# EAGLE board UI_holes (EAGLE 9.2.2)
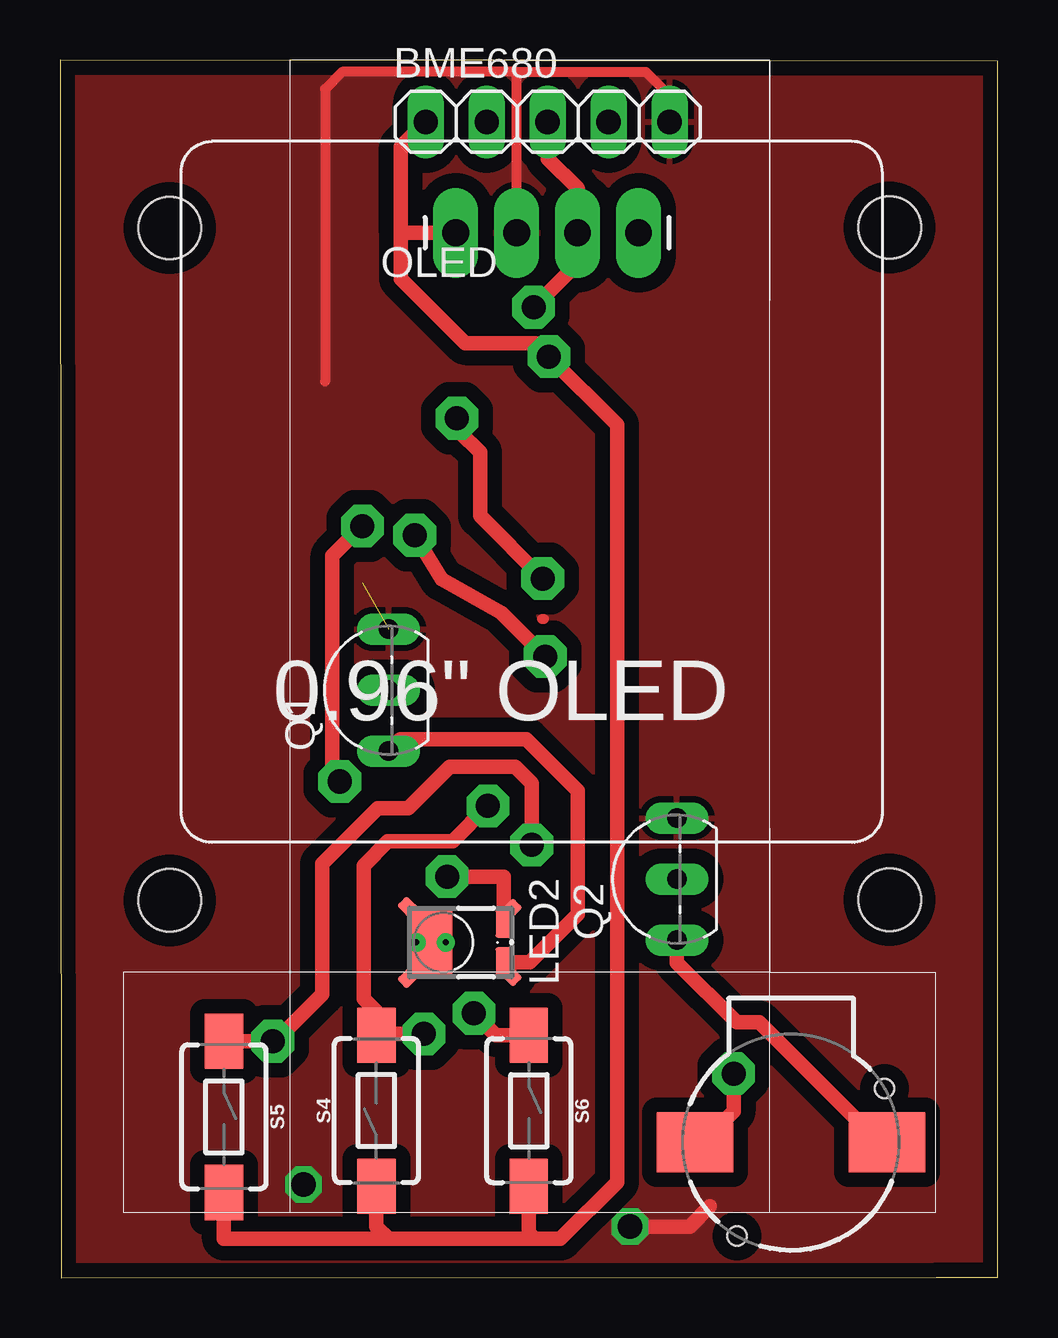
[diagram p0: board, top side]
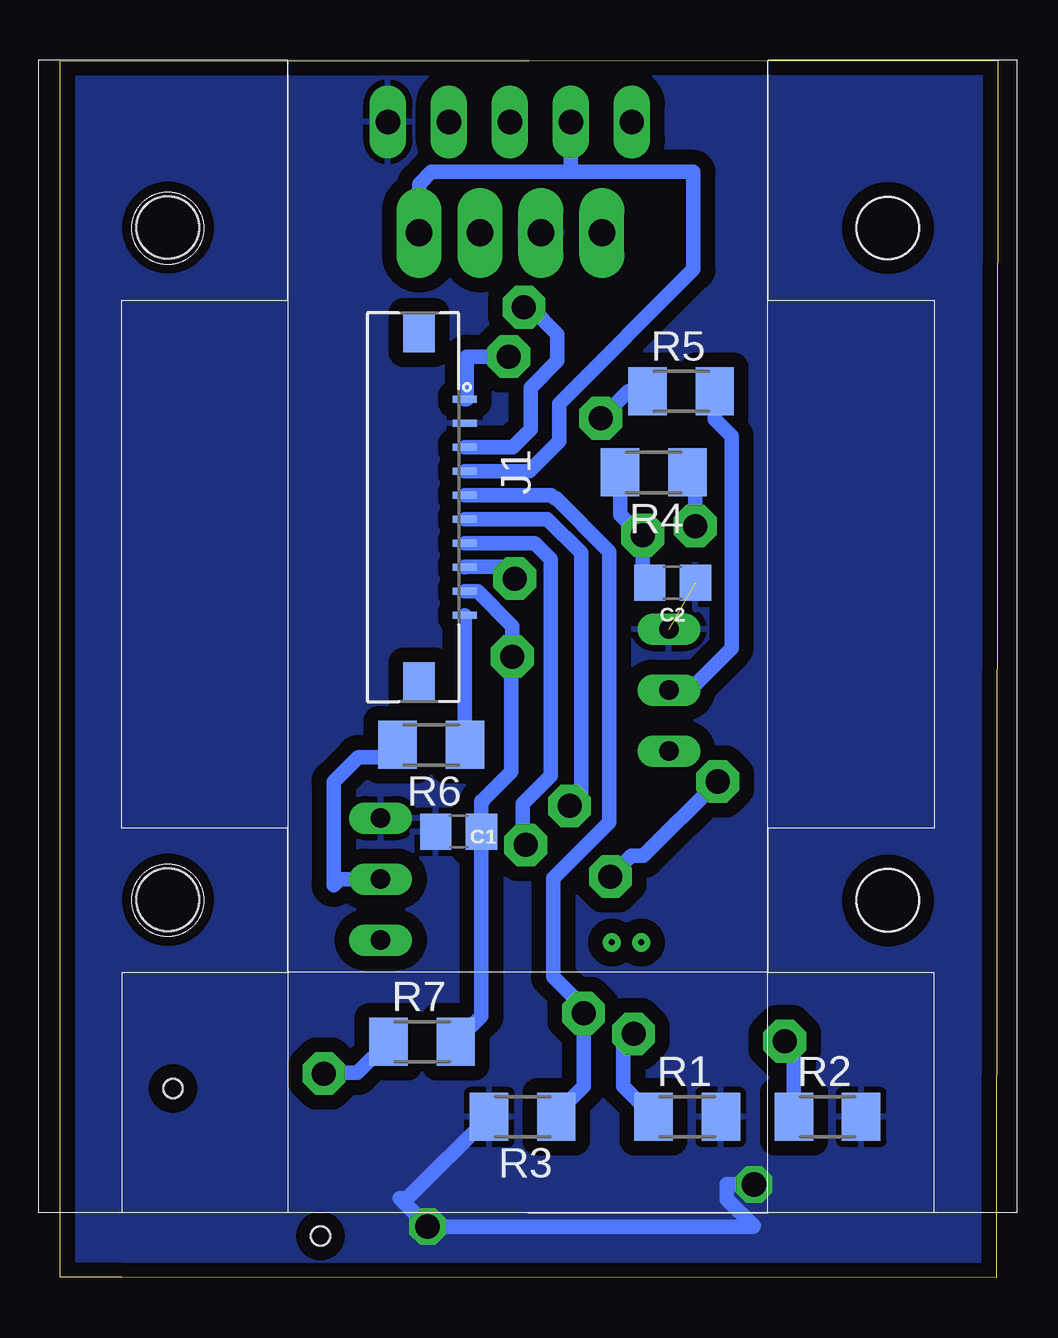
[diagram p1: board, bottom side, seen from below]

Size 39.07 x 50.74 mm. Coordinates in mm from the lower left corner, seen from the top.
Outline: 0.05,0 36.5,0.03 36.55,0.03 39.07,0.03 39.07,50.69 0,50.74 0.05,0
Copper layers (1*16): Top 0.035mm / dielectric 1.5mm / Bottom 0.035mm
Design rules "default *": minimum track width 6mil, minimum drill 0.35mm, track to track 6mil, track to pad 6mil, pad to pad 6mil, via to via 6mil, smd to smd 6mil, copper to edge 10mil, drill to drill 6mil, minimum pad ring 10mil, minimum via ring 8mil, stop-mask expansion 4mil, vias tented up to drill 0mil, thermal gap 10mil
Net classes: 0 default: width 0.254 mm, drill 0.508 mm, clearance 0.254 mm
Holes 2.6 mm at 4.57,43.74 34.57,43.76 4.57,15.72 34.57,15.75

## Footprints (pad centres in the part's own frame; a part is rotated, then mirrored left to right if it is on the bottom)
BUZZER-CCV = smd 3.2 x 2.5: + 4,0; - -4,0 | hole 0.8: -3.9,-2.25; 2.25,3.9
1X05 = drill 1.016 long: 1 -5.08,0; 2 -2.54,0; 3 0,0; 4 2.54,0; 5 5.08,0
C0805 = smd 1.3 x 1.5: 1 -0.95,0; 2 0.95,0
686110183422 = smd 0.3 x 1: 1 -4.5,1.9; 2 -3.5,1.9; 3 -2.5,1.9; 4 -1.5,1.9; 5 -0.5,1.9; 6 0.5,1.9; 7 1.5,1.9; 8 2.5,1.9; 9 3.5,1.9; 10 4.5,1.9 | smd 1.65 x 1.3: Z1 -7.275,0; Z2 7.275,0
LUXEON_REBEL = smd 1.2 x 0.67: A 0.8,-2.51; C -0.8,-2.51 | smd 1 x 0.6 rotated 315: A@1 1.31,-2.75 | smd 1 x 0.6 rotated 225: C@1 -1.31,-2.75 | smd 2.8 x 1.77: TH 0,0.51 | smd 1 x 0.6 rotated 135: TH@1 -1.39,1.39 | smd 1 x 0.6 rotated 45: TH@2 1.39,1.39 | drill 0.25 pad 0.4: TH@3 0,-0.095; TH@4 0,1.125
I2C_OLED_PACKAGE = drill 1.118 pad 1.88 long: 1 0,0; 2 2.54,0; 3 5.08,0; 4 7.62,0
TO92-EBC = drill 0.813 long: B 0,-1.27; C -2.54,-1.27; E 2.54,-1.27
M1206 = smd 1.6 x 2: 1 -1.4,0; 2 1.4,0
TACTILE_SWITCH_SMD_6.0X3.5MM = smd 2.3 x 1.6: 1 -3.15,0; 2 3.15,0

## Placement (x,y rotation side)
B1  Buzzer  [BUZZER-CCV]  30.45,5.64 180 top
BME680  [1X05]  20.32,48.16 0 top
C1  [C0805]  22.45,18.59 0 bottom
C2  [C0805]  13.54,28.96 180 bottom
J1  [686110183422]  24.1,32.11 270 bottom
LED2  LUXEON_REBEL  [LUXEON_REBEL]  15.98,13.97 90 top
OLED  I2C_OLED  [I2C_OLED_PACKAGE]  16.48,43.54 0 top
Q1  BCX59SMD  [TO92-EBC]  12.42,24.49 90 top
Q2  BCX59SMD  [TO92-EBC]  24.43,16.61 90 top
R1  10k  [M1206]  12.93,6.71 0 bottom
R2  10k  [M1206]  7.09,6.71 0 bottom
R3  10k  [M1206]  19.79,6.71 180 bottom
R4  10R  [M1206]  14.33,33.55 180 bottom
R5  10k  [M1206]  13.18,36.93 0 bottom
R6  10k  [M1206]  23.6,22.2 180 bottom
R7  200R  [M1206]  23.98,9.83 0 bottom
S4  MOMENTARY-SWITCH-SPST-SMD-6.0X3.5MM  [TACTILE_SWITCH_SMD_6.0X3.5MM]  13.18,6.96 90 top
S5  MOMENTARY-SWITCH-SPST-SMD-6.0X3.5MM  [TACTILE_SWITCH_SMD_6.0X3.5MM]  6.83,6.71 270 top
S6  MOMENTARY-SWITCH-SPST-SMD-6.0X3.5MM  [TACTILE_SWITCH_SMD_6.0X3.5MM]  19.53,6.96 270 top

## Library data of the parts
B1 = SparkFun
BME680 = pinhead
C1 C2 = eagle-ltspice; PROD_ID: CAP-12416
J1 = Wurth_Elektronik_Electromechanic_FPC_Connectors_&_Flat_Flexible_Cable_rev18c
LED2 = led-lumiled; OC_FARNELL: unknown; OC_NEWARK: unknown
OLED = DIYMall_OLED
Q1 Q2 = transistor-npn
R1-R7 = rcl; SPICEPREFIX: 10K
S4-S6 = SparkFun-Switches; PROD_ID: SWCH-00815; SF_SKU: COM-08229

## Nets
B1: J1.7 R2.1 S5.1
B2: J1.6 R1.1 S4.2
B3: J1.5 R3.1 S6.1
BUZ: J1.10 R6.1
GND: BME680.5 C1.1 C2.1 J1.2 OLED.2 Q1.E Q2.E R1.2 R2.2 R3.2
LED: J1.8 R5.1
N$1: LED2.A LED2.A@1 R4.1
N$2: LED2.C LED2.C@1 Q1.C
N$3: Q1.B R5.2
N$4: B1.-
N$5: B1.+
N$7: Q2.B R6.2
N$8: R7.1
N$9: Q2.C
SCL: BME680.3 J1.3 OLED.3
SDA: BME680.2 J1.4 OLED.4
TH: LED2.TH LED2.TH@1 LED2.TH@2 LED2.TH@3 LED2.TH@4
VCC: BME680.1 J1.1 OLED.1 S4.1 S5.2 S6.2
VIN1: C1.2 C2.2 J1.9 R4.2 R7.2

## Tracks (layer width: path | path; a pad name or v marks a point on that pad's centre or on a via)
B1  (via drill 1 pad 1.78)
  Top 0.254: 8.97,9.86 v8.86,9.86
  Top 0.61: v8.86,9.86 S5.1 | 8.97,9.86 10.92,11.81 10.92,17.25 13.23,19.56 14.5,19.56 16.23,21.29 18.97,21.29 19.66,20.6 v19.66,18.03
  Bottom 0.61: v8.86,9.86 8.49,9.48 R2.1 | J1.7 19.28,30.61 18.62,29.95 18.62,20.92 19.79,19.75 19.79,18.82 19.63,18.67 19.63,18.06 v19.66,18.03
B2  (via drill 1 pad 1.78)
  Top 0.254: 12.93,10.77 12.93,10.36 S4.2
  Top 0.61: 12.93,10.77 13.54,10.16 v15.16,10.16 13.23,10.16 S4.2 13.18,11.1 12.65,11.63 12.65,17.17 13.67,18.19 16.36,18.19 v17.83,19.66
  Bottom 0.254: 15.6,10.14 15.58,10.16 v15.16,10.16
  Bottom 0.61: 15.6,10.14 15.6,7.98 R1.1 | J1.6 18.75,31.61 17.35,30.2 17.35,20.14 v17.83,19.66
B3  (via drill 1 pad 1.78)
  Top 0.61: v17.25,11.02 18.16,10.11 S6.1
  Bottom 0.254: 17.25,11.28 v17.25,11.02 | 18.39,6.84 R3.1
  Bottom 0.61: 17.25,11.28 18.52,12.55 18.52,16.64 16.18,18.97 16.18,30.25 18.4,32.47 18.46,32.47 18.59,32.61 J1.5 | v17.25,11.02 17.25,7.98 18.39,6.84
BUZ
  Bottom 0.61: R6.1 J1.10
GND  (via drill 1.02)  (1 unrouted)
  Top 0.406: OLED.2 19.02,50.24 | 19.02,50.24 24.41,50.24 25.43,49.23 25.4,49.2 BME680.5 | 19.02,50.24 11.76,50.24 11.05,49.53 11.05,37.34 | 20.09,27.46 20.17,27.46
  Top 0.61: 27.08,2.97 26.24,2.13 v23.75,2.13
  Bottom 0.61: R3.2 24.59,3.3 24.92,3.3 v23.75,2.13 10.19,2.13 10.16,2.16 11.28,3.28 11.28,3.89 v10.15,3.89
  pour Top (isolate 0.61): -27.66,60.63 -27.66,-13.84 -19.43,-22.07 53.8,-22.07 64.49,-11.38 64.49,54.33 55.7,58.7 arc-90 52.4,62 52.4,66.42 -23.42,66.42 -26.49,63.35 -26.49,61.8
  pour Bottom (isolate 0.61): -26.64,60.88 -26.64,-16.15 -20.73,-22.07 -20.5,-22.3 55.98,-22.3 65.58,-12.7 65.58,53.82 53.64,65.76 52.4,65.76 -23.06,65.76 -25.04,63.78 -25.04,62.46 -26.62,60.88
LED  (via drill 1 pad 1.78)
  Top 0.61: v20.12,29.13 17.5,31.75 17.5,34.39 16.67,35.23 v16.54,35.81
  Bottom 0.61: v16.54,35.81 16.41,35.94 16.39,35.94 15.4,36.93 R5.1 | v20.12,29.13 20.12,29.49 20.24,29.62 J1.8
N$1  (via drill 1 pad 1.78, 1.02 pad 1.78)
  Top 0.61: v11.66,20.68 11.35,20.98 11.35,30.07 v12.6,31.32 | v16.13,16.72 18.49,16.72 LED2.A
  Bottom 0.61: v16.13,16.72 15.27,17.58 14.75,17.58 v11.66,20.68 | v12.6,31.32 12.6,33.23 R4.1
N$2
  Top 0.61: LED2.C@1 18.73,13.14 19.56,13.14 21.56,15.14 21.56,20.29 19.43,22.43 14.17,22.43 Q1.C
N$3
  Bottom 0.61: Q1.B 12.83,24.49 11.08,26.23 11.08,35.06 11.78,35.76 R5.2
N$7
  Bottom 0.254: R6.2 25.5,21.69
  Bottom 0.61: 25.5,21.69 26.64,21.69 27.66,20.68 27.66,16.36 27.41,16.61 Q2.B
N$8  (via drill 1 pad 1.78)
  Top 0.61: v28.07,8.51 28.07,6.93 27.53,6.4
  Bottom 0.61: R7.1 26.67,8.53 27.08,8.53 v28.07,8.51
N$9
  Top 0.61: Q2.C 25.7,13.13 28.19,10.64 29.13,10.64 33.38,6.4
SCL  (via drill 1 pad 1.78)
  Top 0.61: v19.74,40.44 21.56,42.27 OLED.3 21.56,45.39 20.32,46.63 BME680.3
  Bottom 0.61: J1.3 20.21,34.61 19.46,35.36 19.46,37.08 18.34,38.2 18.34,39.32 19.46,40.44 v19.74,40.44
SDA
  Bottom 0.61: 17.78,46.08 12.67,46.08 12.67,42.01 18.26,36.42 18.26,34.85 19.51,33.6 J1.4 | 17.78,46.08 23.6,46.08 24.1,45.57 OLED.4 | 17.78,46.08 BME680.2
VCC  (via drill 1 pad 1.78)
  Top 0.61: BME680.1 14.2,47.12 14.2,43.54 | 14.2,43.54 OLED.1 | 19.79,1.63 20.85,1.63 23.22,3.99 23.22,35.53 v20.37,38.38 19.81,38.94 16.89,38.94 14.2,41.63 14.2,43.54 | 19.79,1.63 13.69,1.63 | 13.69,1.63 6.83,1.63 S5.2 | 13.69,1.63 13.18,2.13 S4.1 | 19.79,1.63 19.53,1.88 S6.2
  Bottom 0.61: J1.1 22.12,36.61 22.12,38.38 v20.37,38.38
VIN1  (via drill 1 pad 1.78)
  Top 0.61: v20.22,25.88 18.39,27.71 15.9,29.11 v14.78,30.94
  Bottom 0.61: R4.2 15.73,31.78 14.88,30.94 v14.78,30.94 14.78,29.11 14.62,28.95 14.49,29.08 C2.2 | R7.2 21.5,10.9 C1.2 21.5,19.85 21.43,19.88 21.47,19.88 20.27,21.08 20.27,25.83 v20.22,25.88 20.22,27.15 21.67,28.6 J1.9